# EAGLE board chlorophyll_analyzer (EAGLE 9.4.2), part 1 of 2
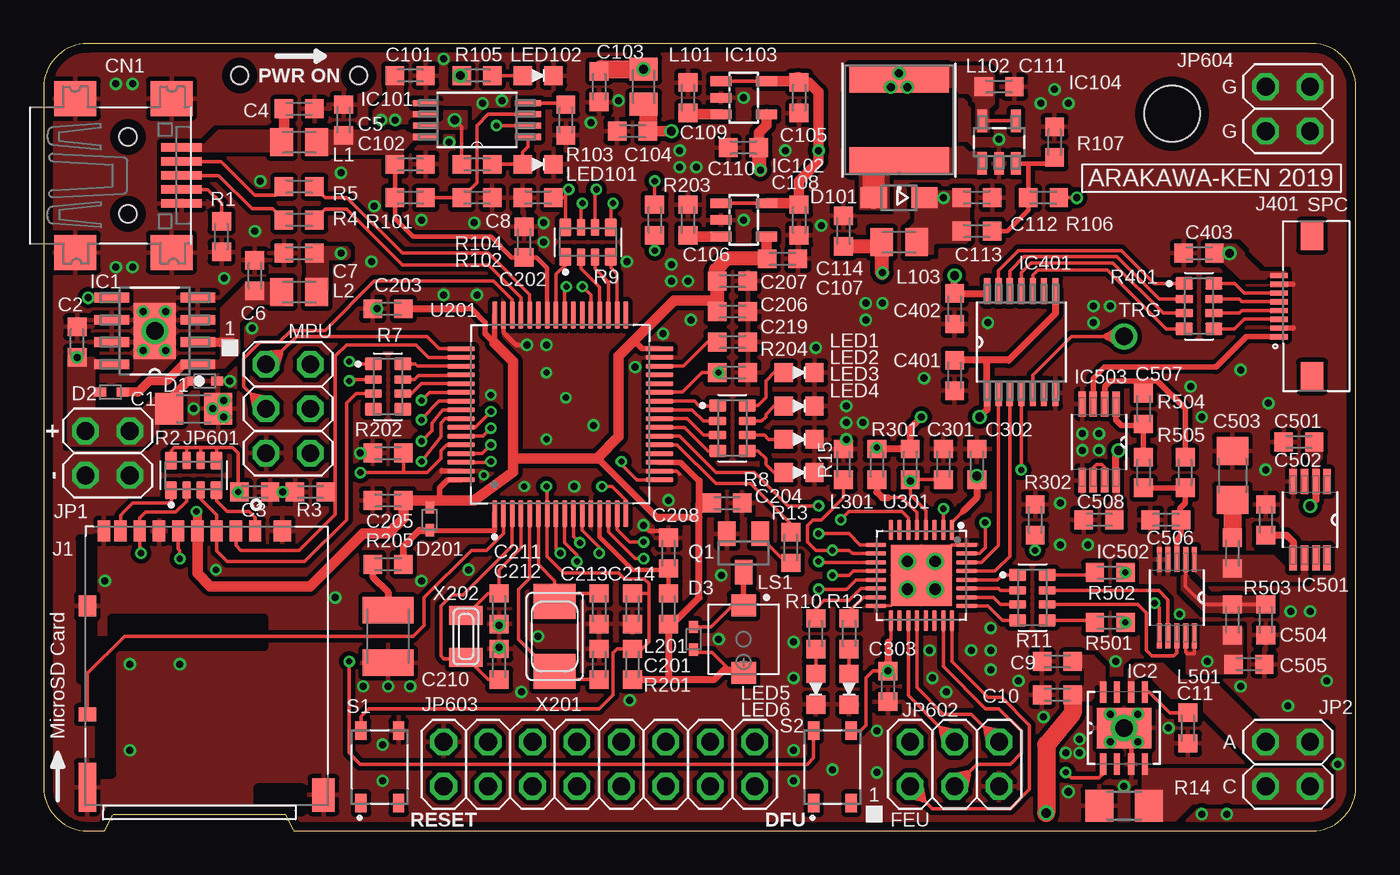
[diagram p0: board, top side]
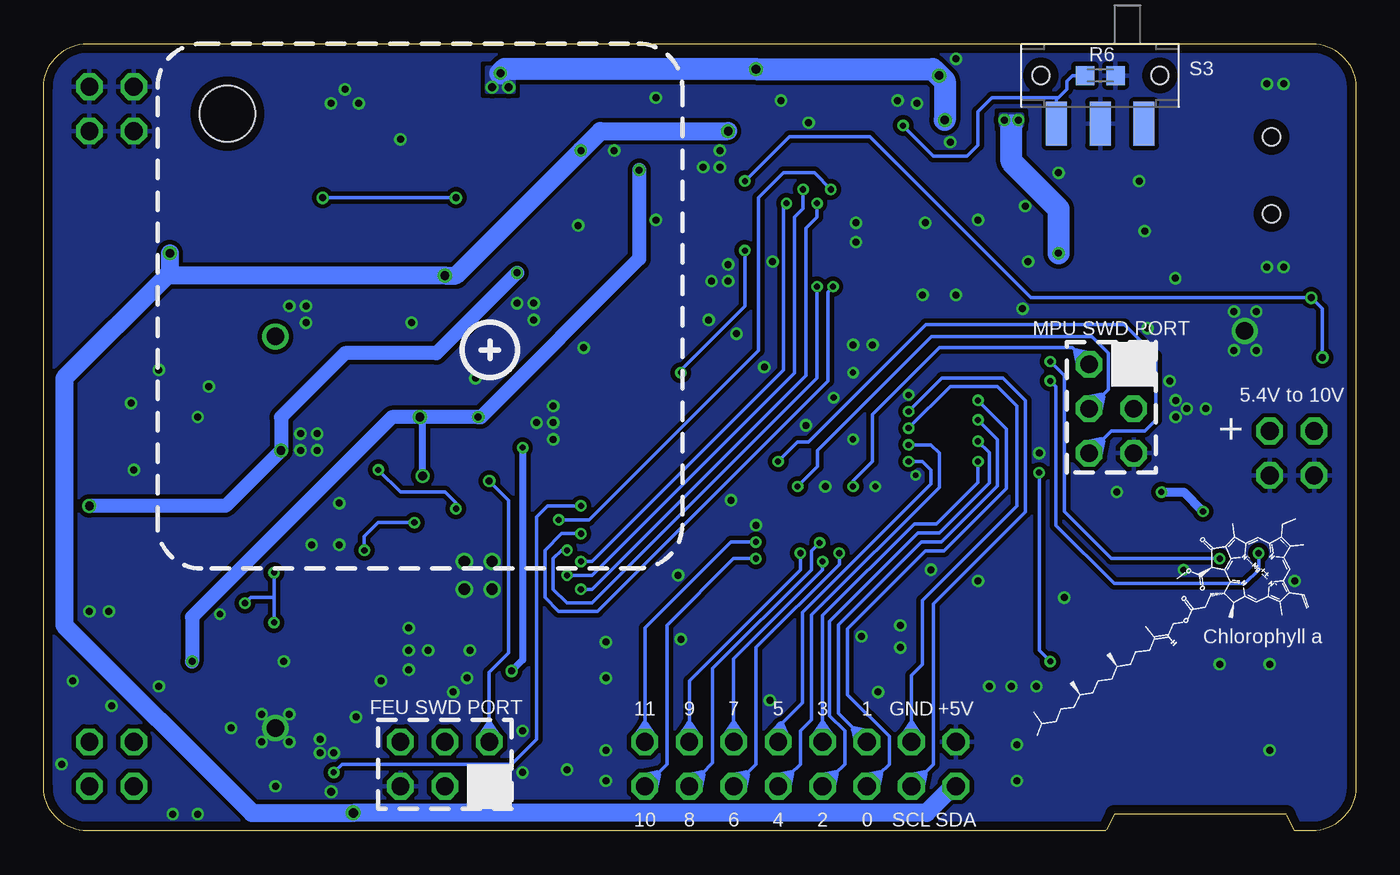
[diagram p1: board, bottom side, seen from below]

Size 75 x 45 mm. Coordinates in mm from the lower left corner, seen from the top.
Outline: 0,42.5 0,2.5 arc90 2.5,0 3.49,0 3.97,0.95 13.81,0.95 14.29,0 72.5,0 arc90 75,2.5 75,42.5 arc90 72.5,45 2.5,45 arc90 0,42.5
Copper layers (1*16): Top 0.035mm / dielectric 1.6mm / Bottom 0.035mm
Design rules "Elecrow_2-layer_PCB_eagle_rule": minimum track width 6mil, minimum drill 12mil, track to track 6mil, track to pad 6mil, pad to pad 6mil, via to via 8mil, smd to smd 0mil, copper to edge 20mil, drill to drill 10mil, minimum pad ring 6mil, minimum via ring 6mil, stop-mask expansion 0mil, vias tented up to drill 100mil, thermal gap 10mil
Holes 3.2 mm at 64.5,41

## Footprints (pad centres in the part's own frame; a part is rotated, then mirrored left to right if it is on the bottom)
C1206 = smd 1.6 x 1.8: 1 -1.4,0; 2 1.4,0
C0603K = smd 1.05 x 1.08: 1 -0.875,0; 2 0.875,0
C1210K = smd 1.5 x 2.9: 1 -1.5,0; 2 1.5,0
USB-MINIB = smd 0.5 x 2.308: D+ 0,4.064; D- -0.8,4.064; GND 1.6,4.064; ID 0.8,4.064; VBUS -1.6,4.064 | smd 2 x 2.4: GND1 -4.4,-2; GND2 -4.4,3.5; GND3 4.4,3.5; GND4 4.4,-2 | hole 1: -2.2,1; 2.2,1
SOD523 = smd 0.7 x 0.5: A 0.7,0; C -0.6,0
SOD323-W = smd 1.5 x 1.2: A 1.45,0; C -1.45,0
HTSOP-J8 = smd 1.981 x 0.559: 1 -2.464,1.905; 2 -2.464,0.635; 3 -2.464,-0.635; 4 -2.464,-1.905; 5 2.464,-1.905; 6 2.464,-0.635; 7 2.464,0.635; 8 2.464,1.905 | smd 2.4 x 3.2: 9 0,0
SON80P410X410X80-9N = smd 1.232 x 0.356: 1 -2.061,1.194; 2 -2.061,0.406; 3 -2.061,-0.406; 4 -2.061,-1.194; 5 2.061,-1.194; 6 2.061,-0.406; 7 2.061,0.406; 8 2.061,1.194 | smd 2.311 x 3.099: 9 0,0
SOP65P640X120-8N = smd 1.473 x 0.356: 1 -2.921,0.965; 2 -2.921,0.33; 3 -2.921,-0.33; 4 -2.921,-0.965; 5 2.921,-0.965; 6 2.921,-0.33; 7 2.921,0.33; 8 2.921,0.965
SOT-23-5 = smd 0.55 x 1.2: 1 -0.95,-1.3; 2 0,-1.3; 3 0.95,-1.3; 4 0.95,1.3; 5 -0.95,1.3
SOT65P285X120-5N = smd 1.27 x 0.559: 1 -1.219,0.965; 2 -1.219,0; 3 -1.219,-0.965; 4 1.219,-0.965; 5 1.219,0.965
SOP65P640X120-14N = smd 1.473 x 0.356: 1 -2.921,1.956; 2 -2.921,1.295; 3 -2.921,0.66; 4 -2.921,0; 5 -2.921,-0.66; 6 -2.921,-1.295; 7 -2.921,-1.956; 8 2.921,-1.956; 9 2.921,-1.295; 10 2.921,-0.66; 11 2.921,0; 12 2.921,0.66; 13 2.921,1.295; 14 2.921,1.956
SOP65P490X110-8N = smd 1.422 x 0.432: 1 -2.184,0.965; 2 -2.184,0.33; 3 -2.184,-0.33; 4 -2.184,-0.965; 5 2.184,-0.965; 6 2.184,-0.33; 7 2.184,0.33; 8 2.184,0.965
SOP50P490X110-10N = smd 1.422 x 0.279: 1 -2.184,0.991; 2 -2.184,0.508; 3 -2.184,0; 4 -2.184,-0.508; 5 -2.184,-0.991; 6 2.184,-0.991; 7 2.184,-0.508; 8 2.184,0; 9 2.184,0.508; 10 2.184,0.991
SOP65P490X110-9N = smd 1.422 x 0.432: 1 -2.184,0.965; 2 -2.184,0.33; 3 -2.184,-0.33; 4 -2.184,-0.965; 5 2.184,-0.965; 6 2.184,-0.33; 7 2.184,0.33; 8 2.184,0.965
HRS_DM3AT-SF-PEJM5 = smd 0.7 x 1.2: 1 3.2,0; 2 2.1,0; 3 1,0; 4 -0.1,0; 5 -1.2,0; 6 -2.3,0; 7 -3.4,0; 8 -4.5,0; SWB -5.45,0 | smd 1 x 1.2: P1 -6.4,-4.3; P4 4.75,0 | smd 1 x 2.8: P2 -6.4,-14.65 | smd 1.3 x 1.9: P3 7.1,-15.1 | smd 1 x 0.8: SWA -6.4,-10.5
687108183722 = smd 0.3 x 1: 1 -1.75,1.9; 2 -1.25,1.9; 3 -0.75,1.9; 4 -0.25,1.9; 5 0.25,1.9; 6 0.75,1.9; 7 1.25,1.9; 8 1.75,1.9 | smd 1.65 x 1.3: Z1 -4.025,0; Z2 4.025,0
2X02 = drill 1.016 octagon: 1 -1.27,-1.27; 2 -1.27,1.27; 3 1.27,-1.27; 4 1.27,1.27
2X03 = drill 1.016 octagon: 1 -2.54,-1.27; 2 -2.54,1.27; 3 0,-1.27; 4 0,1.27; 5 2.54,-1.27; 6 2.54,1.27
2X08 = drill 1.016 octagon: 1 -8.89,-1.27; 2 -8.89,1.27; 3 -6.35,-1.27; 4 -6.35,1.27; 5 -3.81,-1.27; 6 -3.81,1.27; 7 -1.27,-1.27; 8 -1.27,1.27; 9 1.27,-1.27; 10 1.27,1.27; 11 3.81,-1.27; 12 3.81,1.27; 13 6.35,-1.27; 14 6.35,1.27; 15 8.89,-1.27; 16 8.89,1.27
SMD2012 = smd 1.3 x 1.6: 1 -1,0; 2 1,0
IND_TAIYO_NR6028 = smd 1.6 x 5.69: 1 -2.349,0; 2 2.349,0
SMD1608 = smd 1.05 x 1.08: 1 -0.875,0; 2 0.875,0
LED1608 = smd 1.05 x 1.08: A -0.875,0; K 0.875,0
XDCR_SMT-0440-T-R = smd 1.26 x 1.41: 1 -1.925,0; 2 1.925,0
SOT23 = smd 1 x 1.4: 1 -0.95,-1.1; 2 0.95,-1.1; 3 0,1.1
RESCAXS80P320X160X60-8N = smd 0.98 x 0.68: 1 -0.845,1.3; 4 -0.845,-1.3; 5 0.845,-1.3; 8 0.845,1.3 | smd 0.98 x 0.48: 2 -0.845,0.4; 3 -0.845,-0.4; 6 0.845,-0.4; 7 0.845,0.4
R1206 = smd 1.6 x 1.803: 1 -1.422,0; 2 1.422,0
SW_SKRPACE010 = smd 1.05 x 0.65: 1 -2.075,1.075; 2 2.075,1.075; 3 -2.075,-1.075; 4 2.075,-1.075
SW_JS102011SAQN = smd 1.2 x 2.5: 1 -2.5,2.75; 2 0,2.75; 3 2.5,2.75 | hole 1: -3.4,0; 3.4,0
QFP50P1200X1200X160-64N = smd 1.56 x 0.28: 1 -5.68,3.75; 2 -5.68,3.25; 3 -5.68,2.75; 4 -5.68,2.25; 5 -5.68,1.75; 6 -5.68,1.25; 7 -5.68,0.75; 8 -5.68,0.25; 9 -5.68,-0.25; 10 -5.68,-0.75; 11 -5.68,-1.25; 12 -5.68,-1.75; 13 -5.68,-2.25; 14 -5.68,-2.75; 15 -5.68,-3.25; 16 -5.68,-3.75; 33 5.68,-3.75; 34 5.68,-3.25; 35 5.68,-2.75; 36 5.68,-2.25; 37 5.68,-1.75; 38 5.68,-1.25; 39 5.68,-0.75; 40 5.68,-0.25; 41 5.68,0.25; 42 5.68,0.75; 43 5.68,1.25; 44 5.68,1.75; 45 5.68,2.25; 46 5.68,2.75; 47 5.68,3.25; 48 5.68,3.75 | smd 0.28 x 1.56: 17 -3.75,-5.68; 18 -3.25,-5.68; 19 -2.75,-5.68; 20 -2.25,-5.68; 21 -1.75,-5.68; 22 -1.25,-5.68; 23 -0.75,-5.68; 24 -0.25,-5.68; 25 0.25,-5.68; 26 0.75,-5.68; 27 1.25,-5.68; 28 1.75,-5.68; 29 2.25,-5.68; 30 2.75,-5.68; 31 3.25,-5.68; 32 3.75,-5.68; 49 3.75,5.68; 50 3.25,5.68; 51 2.75,5.68; 52 2.25,5.68; 53 1.75,5.68; 54 1.25,5.68; 55 0.75,5.68; 56 0.25,5.68; 57 -0.25,5.68; 58 -0.75,5.68; 59 -1.25,5.68; 60 -1.75,5.68; 61 -2.25,5.68; 62 -2.75,5.68; 63 -3.25,5.68; 64 -3.75,5.68
QFN50P500X500X60-33N = smd 1.177 x 0.25: 1 -2.591,1.75 | smd 1.178 x 0.25: 2 -2.591,1.25; 3 -2.591,0.75; 4 -2.591,0.25; 5 -2.591,-0.25; 6 -2.591,-0.75; 7 -2.591,-1.25; 8 -2.591,-1.75; 17 2.591,-1.75; 18 2.591,-1.25; 19 2.591,-0.75; 20 2.591,-0.25; 21 2.591,0.25; 22 2.591,0.75; 23 2.591,1.25; 24 2.591,1.75 | smd 0.25 x 1.178: 9 -1.75,-2.591; 10 -1.25,-2.591; 11 -0.75,-2.591; 12 -0.25,-2.591; 13 0.25,-2.591; 14 0.75,-2.591; 15 1.25,-2.591; 16 1.75,-2.591; 25 1.75,2.591; 26 1.25,2.591; 27 0.75,2.591; 28 0.25,2.591; 29 -0.25,2.591; 30 -0.75,2.591; 31 -1.25,2.591; 32 -1.75,2.591 | smd 3.5 x 3.5: 33 0,0
NX5032 = smd 2 x 2.4: P$1 2,0; P$2 -2,0
XTAL3215 = smd 1.1 x 1.9: P$1 1.2,0; P$2 -1.2,0

## Placement (x,y rotation side)
C1  47u  [C1206]  8.57,24.13 0 top
C2  1u  [C0603K]  1.91,27.94 90 top
C3  22u  [C0603K]  12.06,19.37 0 top
C4  22u  [C0603K]  14.61,41.27 0 top
C5  0.1u  [C0603K]  17.14,40.64 90 top
C6  22u  [C0603K]  12.06,31.75 90 top
C7  0.1u  [C0603K]  14.61,33.02 180 top
C8  20p  [C0603K]  28.26,36.2 180 top
C9  22u  [C0603K]  57.94,9.68 0 top
C10  0.1u  [C0603K]  57.94,7.78 0 top
C11  47n  [C0603K]  65.41,5.87 90 top
C101  22u  [C0603K]  20.95,43.18 0 top
C102  22u  [C0603K]  20.95,38.1 0 top
C103  22u  [C0603K]  31.75,42.55 270 top
C104  22u  [C0603K]  33.66,40.01 180 top
C105  0.1u  [C0603K]  43.18,41.91 270 top
C106  1u  [C0603K]  36.83,34.92 90 top
C107  22u  [C0603K]  42.23,32.7 0 top
C108  0.1u  [C0603K]  43.18,34.92 270 top
C109  1u  [C0603K]  36.83,41.91 90 top
C110  22u  [C0603K]  40.01,39.05 180 top
C111  22u  [C0603K]  54.61,42.55 0 top
C112  22u  [C0603K]  53.34,36.2 0 top
C113  330p  [C0603K]  53.34,34.29 0 top
C114  0.1u  [C0603K]  45.72,34.29 90 top
C201  0.1u  [C0603K]  33.66,12.7 90 top
C202  0.1u  [C0603K]  27.46,33.66 270 top
C203  0.1u  [C0603K]  19.68,29.84 180 top
C204  0.1u  [C0603K]  39.05,18.73 0 top
C205  0.1u  [C0603K]  19.68,18.89 180 top
C206  0.1u  [C0603K]  39.37,29.69 0 top
C207  4.7u  [C0603K]  39.37,31.43 0 top
C208  0.1u  [C0603K]  35.72,15.88 90 top
C210  CPH3225A(11mF)  [C1210K]  19.68,11.11 270 top
C211  12p  [C0603K]  26.04,12.7 270 top
C212  12p  [C0603K]  26.04,9.53 90 top
C213  18p  [C0603K]  31.75,12.7 270 top
C214  18p  [C0603K]  31.75,9.53 90 top
C219  4.7u  [C0603K]  39.37,27.94 0 top
C301  0.1u  [C0603K]  51.44,20.95 90 top
C302  0.1u  [C0603K]  53.34,20.95 90 top
C303  0.1u  [C0603K]  48.26,8.26 270 top
C401  0.1u  [C0603K]  52.07,26.04 90 top
C402  0.1u  [C0603K]  52.07,29.84 270 top
C403  22uF  [C0603K]  66.04,33.02 180 top
C501  1u  [C0603K]  71.75,22.23 180 top
C502  1u  [C0603K]  69.85,17.78 90 top
C503  47u  [C1206]  67.94,20.32 270 top
C504  1u  [C0603K]  69.85,12.06 270 top
C505  1u  [C0603K]  68.9,9.53 0 top
C506  2.4n  [C0603K]  64.14,17.78 180 top
C507  2.4n  [C0603K]  62.87,24.13 90 top
C508  0.1u  [C0603K]  60.33,17.78 180 top
CN1  [USB-MINIB]  3.81,37.47 270 top
D1  RB520S-30  [SOD523]  9.21,25.72 0 top
D2  RB520S-30  [SOD523]  3.81,25.08 0 top
D3  RB520S-30  [SOD523]  37.15,10.95 90 top
D101  CUS10F30 H3F  [SOD323-W]  48.9,36.2 180 top
D201  RB520S-30  [SOD523]  22.07,17.78 90 top
IC1  BD50HC5WEFJ  [HTSOP-J8]  6.35,28.57 180 top
IC2  TL4242DRJR  [SON80P410X410X80-9N]  61.75,5.87 90 top
IC101  TPS2113PW  [SOP65P640X120-8N]  24.77,40.64 180 top
IC102  NJM2863  [SOT-23-5]  40.01,34.92 270 top
IC103  NJM2863  [SOT-23-5]  40.01,41.91 270 top
IC104  LM2735YQMF  [SOT65P285X120-5N]  54.61,39.37 90 top
IC401  TXB0104PWR  [SOP65P640X120-14N]  55.88,27.94 90 top
IC501  REF5050AIDGKT  [SOP65P490X110-8N]  72.39,17.78 270 top
IC502  ADS8866IDGS  [SOP50P490X110-10N]  64.77,13.34 270 top
IC503  OPA2388IDGKT  [SOP65P490X110-9N]  60.33,22.23 270 top
J1  DM3AT-SF-PEJM5  [HRS_DM3AT-SF-PEJM5]  8.89,17.14 0 top
J401  [687108183722]  72.5,30 90 top
JP1  [2X02]  3.65,21.59 270 top
JP2  [2X02]  71.12,3.81 270 top
JP601  [2X03]  13.97,24.13 270 top
JP602  [2X03]  52.07,3.81 0 top
JP603  [2X08]  31.75,3.81 0 top
JP604  [2X02]  71.12,41.27 90 top
L1  [SMD2012]  14.61,39.37 180 top
L2  [SMD2012]  14.61,30.8 180 top
L101  [SMD2012]  34.29,42.55 90 top
L102  NR6028T150M  [IND_TAIYO_NR6028]  48.9,40.64 90 top
L103  [SMD2012]  48.9,33.66 0 top
L201  [SMD1608]  35.72,12.7 90 top
L301  [SMD1608]  47.62,20.95 270 top
L501  [SMD1608]  67.94,12.06 90 top
LED1  LED1608  [LED1608]  43.18,26.19 0 top
LED2  LED1608  [LED1608]  43.18,24.29 0 top
LED3  LED1608  [LED1608]  43.18,22.38 0 top
LED4  LED1608  [LED1608]  43.18,20.48 0 top
LED5  LED1608  [LED1608]  44.13,8.1 270 top
LED6  LED1608  [LED1608]  46.04,8.1 270 top
LED101  LED1608  [LED1608]  28.26,38.1 0 top
LED102  LED1608  [LED1608]  28.26,43.18 0 top
LS1  SMT-0440-T-R  [XDCR_SMT-0440-T-R]  40.01,10.95 270 top
Q1  [SOT23]  40.01,15.88 180 top
R1  100k  [SMD1608]  10.16,33.97 270 top
R2  22k  [RESCAXS80P320X160X60-8N]  8.57,20.32 90 top
R3  100k  [SMD1608]  15.24,19.37 180 top
R4  10  [SMD1608]  14.61,34.92 0 top
R5  10  [SMD1608]  14.61,36.83 0 top
R6  0(N/C)  [SMD1608]  14.61,43.18 180 bottom
R7  20  [RESCAXS80P320X160X60-8N]  19.68,25.4 0 top
R8  4.7k  [RESCAXS80P320X160X60-8N]  39.37,23.02 0 top
R9  20  [RESCAXS80P320X160X60-8N]  31.11,33.66 90 top
R10  4.7k  [SMD1608]  44.13,11.27 270 top
R11  20  [RESCAXS80P320X160X60-8N]  56.52,13.34 0 top
R12  4.7k  [SMD1608]  46.04,11.27 270 top
R13  1k  [SMD1608]  42.7,16.19 270 top
R14  [R1206]  61.75,1.43 0 top
R15  100k  [SMD1608]  45.72,20.95 90 top
R101  1k  [SMD1608]  20.95,36.2 0 top
R102  10k  [SMD1608]  24.77,36.2 0 top
R103  400  [SMD1608]  29.84,40.64 270 top
R104  4.7k  [SMD1608]  24.77,38.1 0 top
R105  4.7k  [SMD1608]  24.77,43.18 0 top
R106  86.6k  [SMD1608]  57.15,36.2 0 top
R107  10.2k  [SMD1608]  57.78,39.37 270 top
R201  10k  [SMD1608]  33.66,9.53 90 top
R202  10k  [SMD1608]  19.68,21.59 0 top
R203  10k  [SMD1608]  34.92,34.92 90 top
R204  4.7k  [SMD1608]  39.37,26.19 180 top
R205  100  [SMD1608]  19.68,15.24 180 top
R301  10k  [SMD1608]  49.53,20.95 270 top
R302  10k  [SMD1608]  56.67,17.78 90 top
R401  20  [RESCAXS80P320X160X60-8N]  66.04,30 0 top
R501  0  [SMD1608]  60.96,11.91 0 top
R502  0(N/C)  [SMD1608]  60.96,14.76 0 top
R503  0  [SMD1608]  67.94,15.88 270 top
R504  20k  [SMD1608]  62.87,20.48 90 top
R505  20k  [SMD1608]  65.25,20.48 90 top
S1  SKRPACE010  [SW_SKRPACE010]  19.21,3.65 90 top
S2  SKRPACE010  [SW_SKRPACE010]  45.09,3.65 90 top
S3  JS102011SAQN  [SW_JS102011SAQN]  14.61,43.18 180 bottom
U201  STM32F446RET6  [QFP50P1200X1200X160-64N]  29.53,23.81 90 top
U301  STM32L432KCU6  [QFN50P500X500X60-33N]  50.16,14.61 270 top
X201  8.0MHz  [NX5032]  29.21,11.11 270 top
X202  32.768k  [XTAL3215]  24.13,11.11 90 top

## Library data of the parts
C1-C11 C101-C114 C201-C208 C210-C214 C219 C301-C303 C401-C403 C501-C508 = rcl; SPICEPREFIX: C
CN1 Q1 = adafruit
D1-D3 D101 D201 = diode
IC1 = BDxxHC5WEFJ
IC2 = TL4242DRJR; AVAILABILITY: Unavailable; DESCRIPTION: LED DRVR 5V/9V/12V/15V/18V/24V 8-Pin WSON EP T/R; MF: Texas Instruments; MP: TL4242DRJR; PACKAGE: WSON-8 Texas Instruments; PRICE: None
IC101 = TPS2113PW; DESCRIPTION: Power Muxes and Current Limited Switches Dual In/Single Out Autoswitch Power MUX; DIGI-KEY_PART_NUMBER: 296-14205-5-ND; DIGI-KEY_PURCHASE_URL: https://www.digikey.com/product-detail/en/texas-instruments/TPS2113PW/296-14205-5-ND/526040?utm_source=snapeda&utm_medium=aggregator&utm_campaign=symbol; MF: Texas Instruments; MP: TPS2113PW; PACKAGE: TSSOP-8 Texas Instruments
IC102 IC103 = Fugu_LSI
IC104 = LM2735YQMF; AVAILABILITY: Unavailable; DESCRIPTION: 520kHz/1.6MHz - Space-Efficient Boost and SEPIC DC-DC Regulator 5-SOT-23 -40 to 125; MF: Texas Instruments; MP: LM2735YQMF/NOPB; PACKAGE: SOT-23 Texas Instruments; PRICE: None
IC401 = TXB0104PWR; AVAILABILITY: Unavailable; DESCRIPTION: 4-Bit Bidirectional Voltage-Level Shifter with Auto Direction Sensing and +/-15 kV ESD Protect 14-TSSOP -40 to 85; MF: Texas Instruments; MP: TXB0104PWR; PACKAGE: TSSOP-14 Texas Instruments; PRICE: None
IC501 = REF5050AIDGKT; AVAILABILITY: Unavailable; DESCRIPTION: VOLTAGE REFERENCE, SERIES, 5V, MSOP-8; Topology: Series; Input Voltage Min: 5.2V;; MF: Texas Instruments; MP: REF5050AIDGKT; PACKAGE: MSOP-8 Texas Instruments; PRICE: None; SPICEPREFIX: X
IC502 = ADS8319IBDGSR; DESCRIPTION: Precision 16-Bit SAR w/ SPI interface in MSOP-10 10-VSSOP -40 to 85; DIGI-KEY_PART_NUMBER: ADS8319IBDGSR-ND; DIGI-KEY_PURCHASE_URL: https://www.digikey.com/product-detail/en/texas-instruments/ADS8319IBDGSR/ADS8319IBDGSR-ND/2047198?utm_source=snapeda&utm_medium=aggregator&utm_campaign=symbol; MF: Texas Instruments; MP: ADS8319IBDGSR; PACKAGE: MSOP-10 Texas Instruments
IC503 = OPA2388IDGKT; AVAILABILITY: Uavailable; MF: Texsas Instruments; MP: OPA2388IDGKT; PACKAGE: MSOP-8 Texas Instruments; PRICE: None
J1 = DM3AT-SF-PEJM5; AVAILABILITY: Unavailable; DESCRIPTION: DM3 RA SMT microSD memory card push/push; MF: Hirose; MP: DM3AT-SF-PEJM5; PACKAGE: None; PRICE: None
J401 = Eagle_FPC_CONNECTOR_AND_FFC_CAB (rev18c)
JP1 JP2 JP601-JP604 = pinhead
L1 L2 L101 L103 L201 L301 L501 LED1-LED6 LED101 LED102 R1 R3-R8 R10-R13 R15 R101-R107 R201-R205 R301 R302 R401 R503-R505 = Fugu_RCL
L102 = NR6028T; MANUFACTURER_PART_NUMBER: NR6028T150M; VENDOR: TAIYO YUDEN
LS1 = SMT-0440-T-R; DESCRIPTION: Audio Indicator Transducer Electromagnetic 3Vpk 90mA Solder Pad 2Vpk 3500Hz to 4500Hz Surface Mount; DIGI-KEY_PART_NUMBER: 668-1489-1-ND; DIGI-KEY_PURCHASE_URL: https://www.digikey.jp/product-detail/en/pui-audio-inc/SMT-0440-T-R/668-1489-1-ND/5113610?utm_source=snapeda&utm_medium=aggregator&utm_campaign=symbol; MF: PUI; MP: SMT-0440-T-R; PACKAGE: PUI
R2 R9 = Fugu_RCL; SPICEPREFIX: R
R14 = rcl; SPICEPREFIX: R
R501 = Fugu_Generic
R502 = Fugu_Generic; SPICEPREFIX: R
S1 S2 = SKRPACE010; AVAILABILITY: Unavailable; DESCRIPTION: Switch Tactile N.O. SPST Button J-Bend 0.05A 16VDC 2.55N SMD Automotive T/R; MF: ALPS; MP: SKRPACE010; PACKAGE: None; PRICE: None; SPICEPREFIX: S
S3 = JS102011SAQN; AVAILABILITY: Unavailable; DESCRIPTION: JS10 Series SPDT On-On 6 V 0.3 A Gull Wing SMT Slide Switch; MF: C&K; MP: JS102011SAQN; PACKAGE: None; PRICE: None
U201 = STM32F446RET6; AVAILABILITY: Unavailable; DESCRIPTION: MCU 32-Bit STM32 ARM Cortex M4 RISC 512KB Flash 2.5V/3.3V 64-Pin LQFP Tray; MF: STMicroelectronics; MP: STM32F446RET6; PACKAGE: LQFP-64 STMicroelectronics; PRICE: None
U301 = STM32L432KCU6; AVAILABILITY: Unavailable; DESCRIPTION: MCU 32-bit STM32L ARM Cortex M4 RISC 256KB Flash 2.5V/3.3V 32-Pin UFQFPN EP Tray; MF: STMicroelectronics; MP: STM32L432KCU6; PACKAGE: UFQFN-32 STMicroelectronics; PRICE: None
X201 X202 = adafruit; SPICEPREFIX: X

## Nets
!FEU_NRST: C301.1 JP602.2 R301.2 U301.4
!FEU_SPI_CS: R15.1 U201.37 U301.10
!MPU_NRST: C201.2 JP601.2 R201.2 S1.2 U201.7
!SD_CDETECT: J1.SWA U201.2
!SD_SPI_CS: J1.2 R3.1 U201.50
+3V3A: C3.1 C107.1 C203.1 C204.1 C205.1 C206.1 C207.1 D3.C D201.A IC102.4 J1.4 L201.1 LS1.2 R2.5 R2.6 R2.7 R2.8 R201.1 U201.19 U201.32 U201.48 U201.64
+3V3C: C110.1 C302.1 C303.1 C401.2 C505.1 IC103.4 IC401.1 IC401.8 IC502.9 IC502.10 L301.1 L501.1 R301.1 S2.4 U301.1 U301.17
+5VA: C103.1 C111.1 IC101.7 IC104.4 IC104.5 L101.2 L102.2 R104.1 R105.1
+5VD: C9.2 C10.2 C104.1 C105.1 C108.1 C402.1 C403.1 IC2.8 IC102.1 IC102.5 IC103.1 IC103.5 IC401.14 J401.8 JP603.1 L101.1
+12V: C114.1 C501.1 C508.1 IC501.2 IC503.8 L103.1
ADC_AT_TRG: R11.8 R502.1
ADC_MN_TRG: R11.5 R501.1
ADC_SPI_MISO: IC502.7 R11.7
ADC_SPI_SCLK: IC502.8 R11.6
ADC_UNIT:ADC_CTRG: IC502.6 R501.2 R502.2
ADC_UNIT:N$1: C503.2 R503.1
ADC_UNIT:N$2: IC503.6 IC503.7
ADC_UNIT:N$3: C504.1 IC502.2 L501.2
ADC_UNIT:N$25: C506.1 IC502.3 R504.1 R505.1
ADC_UNIT:N$26: C507.1 IC503.1 R504.2
ADC_UNIT:N$30: C507.2 IC503.2 R505.2
ADC_UNIT:N$34: C502.1 IC501.5
ADC_UNIT:VREF: IC501.6 IC502.1 R503.2
EXT_GPIO0: JP603.5 U201.54
EXT_GPIO1: JP603.6 U201.55
EXT_GPIO2: JP603.7 U201.56
EXT_GPIO3: JP603.8 U201.57
EXT_GPIO4: JP603.9 U201.61
EXT_GPIO5: JP603.10 U201.62
EXT_GPIO6: JP603.11 U201.8
EXT_GPIO7: JP603.12 U201.9
EXT_GPIO8: JP603.13 U201.10
EXT_GPIO9: JP603.14 U201.11
EXT_GPIO10: JP603.15 U201.14
EXT_GPIO11: JP603.16 U201.15
FEU_MCLK: C8.1 R9.8 U301.6
FEU_RX: JP602.6 U301.20
FEU_SPI_BUSY: U201.40 U301.9
FEU_SPI_SCLK: R9.5 U301.11
FEU_ST_LED0: R10.1 U301.14
FEU_ST_LED1: R12.1 U301.15
FEU_SWCLK: JP602.1 U301.24
FEU_SWDIO: JP602.3 U301.23
FEU_TX: JP602.4 U301.19
FPU_SPI_MISO: R9.6 U301.12
FPU_SPI_MOSI: R9.7 U301.13
FRONT_END_UNIT:N$1: L301.2 U301.5
FRONT_END_UNIT:N$10: R302.1 U301.31
FRONT_END_UNIT:TRG_SELECT: U301.22
GND: C1.2 C2.2 C3.2 C4.2 C5.2 C6.2 C7.2 C8.2 C9.1 C10.1 C11.1 C101.2 C102.2 C103.2 C104.2 C105.2 C106.2 C107.2 C108.2 C109.2 C110.2 C111.2 C112.2 C114.2 C201.1 C202.1 C203.2 C204.2 C205.2 C206.2 C207.2 C208.2 C210.2 C211.2 C212.2 C213.2 C214.2 C219.2 C301.2 C302.2 C303.2 C401.1 C402.2 C403.2 C501.2 C502.2 C503.1 C504.2 C505.2 C506.2 C508.2 CN1.GND CN1.GND1 CN1.GND2 CN1.GND3 CN1.GND4 D1.A IC1.3 IC1.4 IC1.6 IC1.7 IC1.9 IC2.3 IC2.9 IC101.5 IC102.2 IC103.2 IC104.2 IC401.7 IC501.4 IC502.4 IC502.5 IC503.4 IC503.5 J1.6 J1.P1 J1.P2 J1.P3 J1.P4 J1.SWB J401.2 J401.7 JP1.3 JP1.4 JP601.5 JP602.5 JP603.2 JP604.1 JP604.2 JP604.3 JP604.4 LED1.K LED2.K LED3.K LED4.K LED5.K LED6.K LED101.K LED102.K Q1.2 R1.2 R3.2 R6.1 R14.1 R15.2 R102.2 R103.2 R107.1 R202.1 R204.1 R302.2 S1.4 S3.2 U201.12 U201.18 U201.31 U201.47 U201.63 U301.16 U301.32 U301.33
LED_PWM_OUT: IC2.1 U201.22
MAIN_PROCESSING_UNIT:EXT_CLK: C214.1 U201.5 X201.P$1
MAIN_PROCESSING_UNIT:N$1: C219.1 U201.30
MAIN_PROCESSING_UNIT:N$2: C212.1 U201.3 X202.P$2
MAIN_PROCESSING_UNIT:N$3: C208.1 L201.2 U201.13
MAIN_PROCESSING_UNIT:N$4: D201.C R205.1 U201.1
MAIN_PROCESSING_UNIT:N$6: C211.1 U201.4 X202.P$1
MAIN_PROCESSING_UNIT:N$9: C213.1 U201.6 X201.P$2
MAIN_PROCESSING_UNIT:N$11: R203.1 R204.2 U201.27
MAIN_PROCESSING_UNIT:N$12: C210.1 R205.2
MPU_DFU: R202.2 S2.2 U201.60
MPU_RX: JP601.6 U201.17
MPU_SCL: JP603.3 U201.58
MPU_SDA: JP603.4 U201.59
MPU_ST_LED0: R8.1 U201.26
MPU_ST_LED1: R8.2 U201.25
MPU_ST_LED2: R8.3 U201.24
MPU_ST_LED3: R8.4 U201.23
MPU_SWCLK: JP601.1 U201.49
MPU_SWDIO: JP601.3 U201.46
MPU_TX: JP601.4 U201.16
N$1: LED1.A R8.8
N$2: LED2.A R8.7
N$3: LED3.A R8.6
N$4: LED4.A R8.5
N$5: J1.8 R2.1
N$6: J1.1 R2.4
N$7: C6.1 D2.A IC1.1 IC1.2 L2.2
N$8: LED5.A R10.2
N$9: Q1.1 R13.2
N$10: C4.1 CN1.VBUS L1.2
N$11: IC101.2 R6.2 S3.3
N$12: LED6.A R12.2
N$13: C11.2 IC2.5
N$14: D3.A LS1.1 Q1.3
N$16: R9.4 U201.34
N$17: C7.1 C101.1 IC101.6 L2.1
N$18: R7.8 U201.51
N$19: R7.6 U201.53
N$20: IC2.4 JP2.3 JP2.4 R14.2
N$21: IC503.3 J401.1
N$22: R7.7 U201.52
N$23: R9.2 U201.36
N$24: R9.3 U201.35
N$25: R9.1 U201.41
N$26: R11.1 U301.28
N$27: R11.2 U301.27
N$28: R11.3 U301.26
N$29: R11.4 U301.25
N$30: CN1.ID R1.1
POWER_LED_OUT: IC2.6 JP2.1 JP2.2
POWER_UNIT:N$2: IC101.3 R101.2 R102.1
POWER_UNIT:N$3: IC101.4 R103.1
POWER_UNIT:N$4: C106.1 IC102.3
POWER_UNIT:N$5: LED102.A R105.2
POWER_UNIT:N$6: C109.1 IC103.3
POWER_UNIT:N$7: C112.1 C113.1 D101.C L103.2 R106.2
POWER_UNIT:N$8: D101.A IC104.1 L102.1
POWER_UNIT:N$9: C113.2 IC104.3 R106.1 R107.2
POWER_UNIT:SUP_CH_STAT1: IC101.1 LED101.A R104.2
SD_SPI_MISO: J1.7 R2.2 R7.2
SD_SPI_MOSI: J1.3 R2.3 R7.3
SD_SPI_SCLK: J1.5 R7.1
SOUND_OUT: R13.1 U201.21
SPC_EOS: IC401.4 U301.2
SPC_SCLK: IC401.2 U301.30
SPC_ST: IC401.3 U301.29
SPECTROMETER_UNIT:N$1: IC401.13 R401.1
SPECTROMETER_UNIT:N$2: IC401.12 R401.2
SPECTROMETER_UNIT:N$3: IC401.11 R401.3
SPECTROMETER_UNIT:N$4: IC401.10 R401.4
SPECTROMETER_UNIT:N$5: J401.6 R401.8
SPECTROMETER_UNIT:N$6: J401.5 R401.7
SPECTROMETER_UNIT:N$7: J401.4 R401.6
SPECTROMETER_UNIT:N$8: J401.3 R401.5
SPECTROMETER_UNIT:TRG_OUT: IC401.5
USB_N: R5.2 U201.44
USB_P: R4.2 U201.45
USBC_N: CN1.D- R5.1
USBC_P: CN1.D+ R4.1
VBAT: C1.1 C2.1 D1.C D2.C IC1.5 IC1.8 JP1.1 JP1.2 R203.2
VUSB: C5.1 C102.1 C202.2 IC101.8 L1.1 R101.1 U201.42